# Allegro board RM08K_TEST_V10.brd
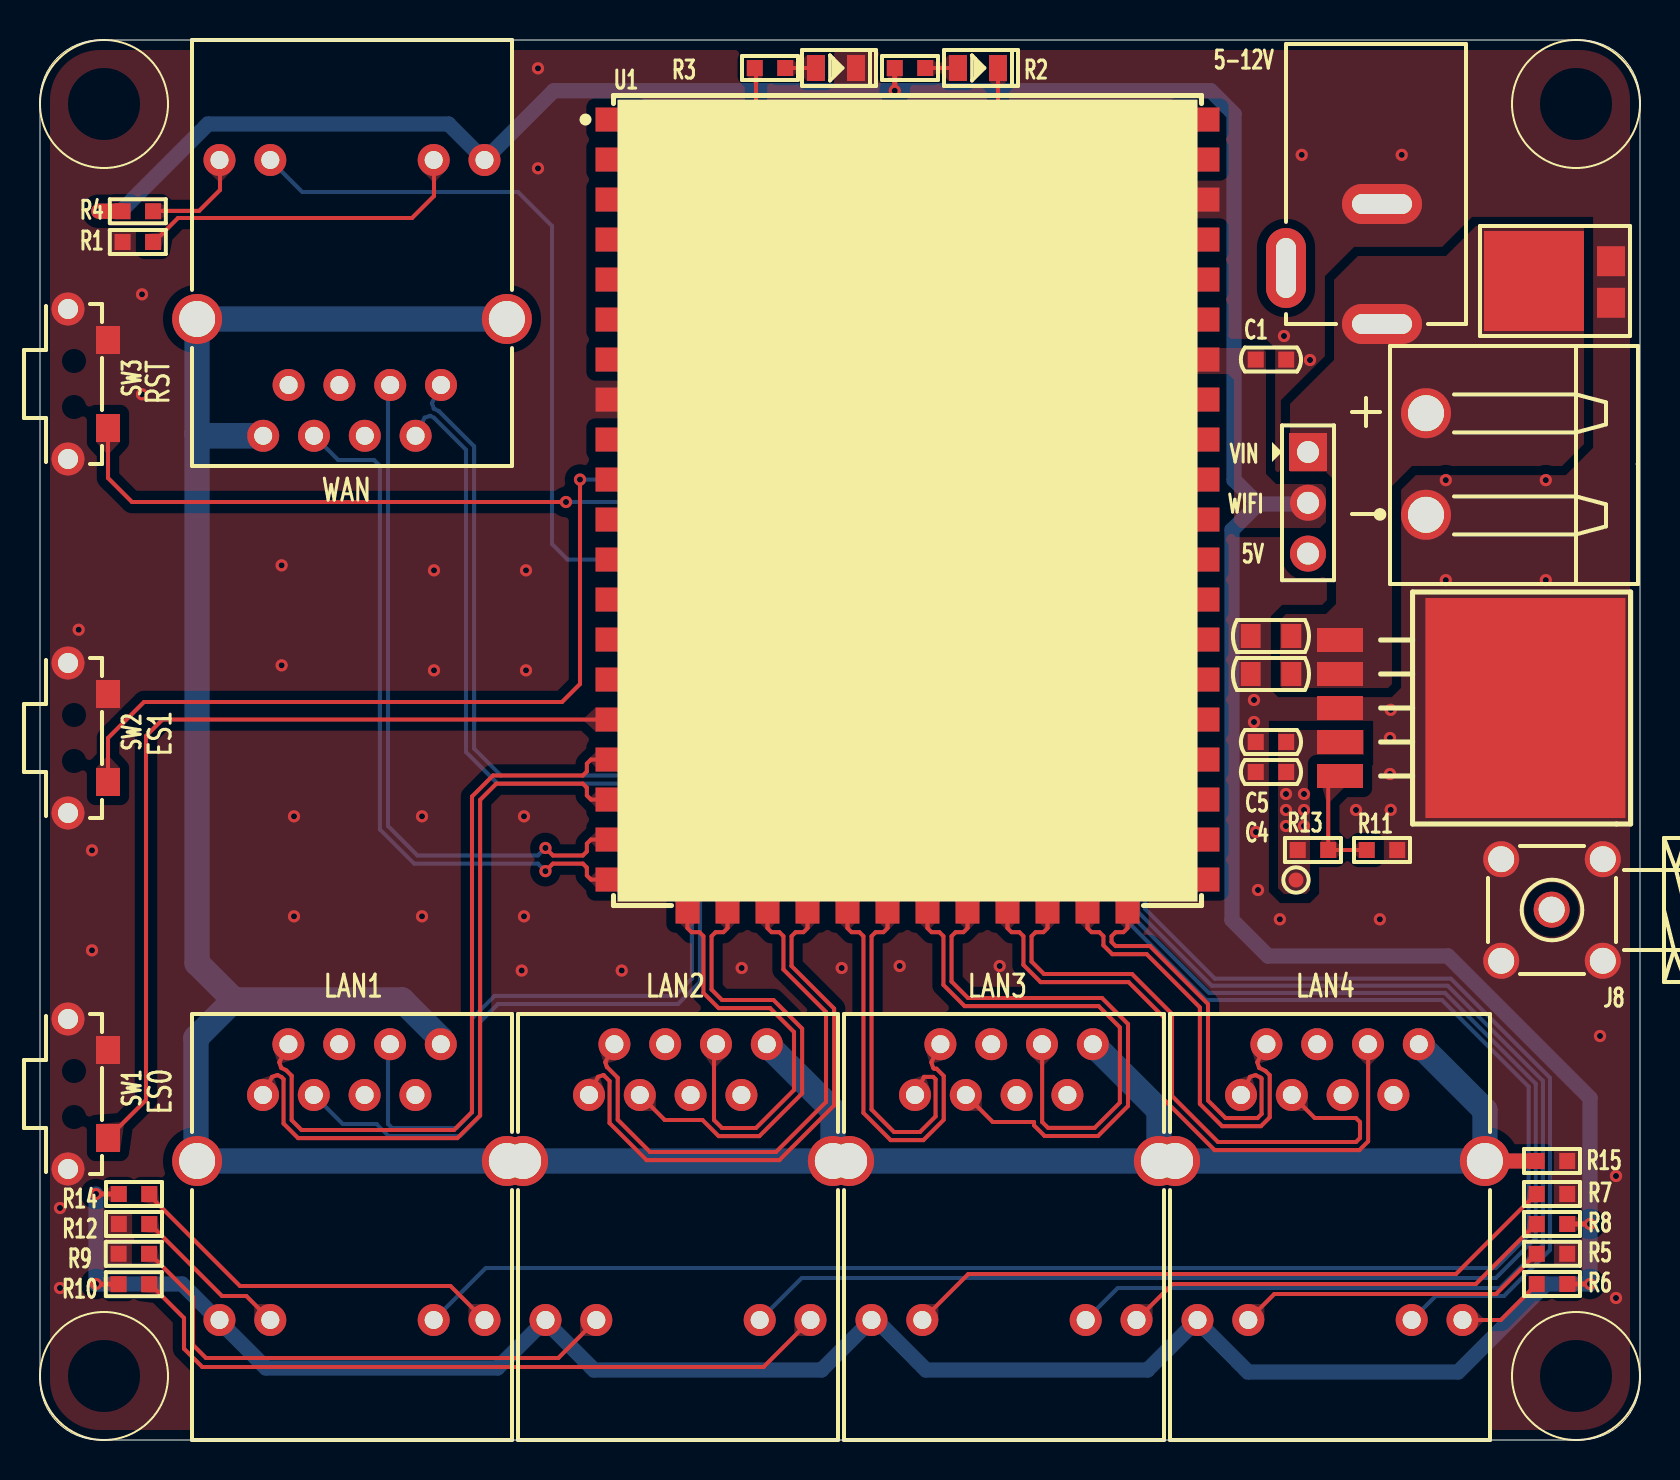
[diagram p0: board, top side]
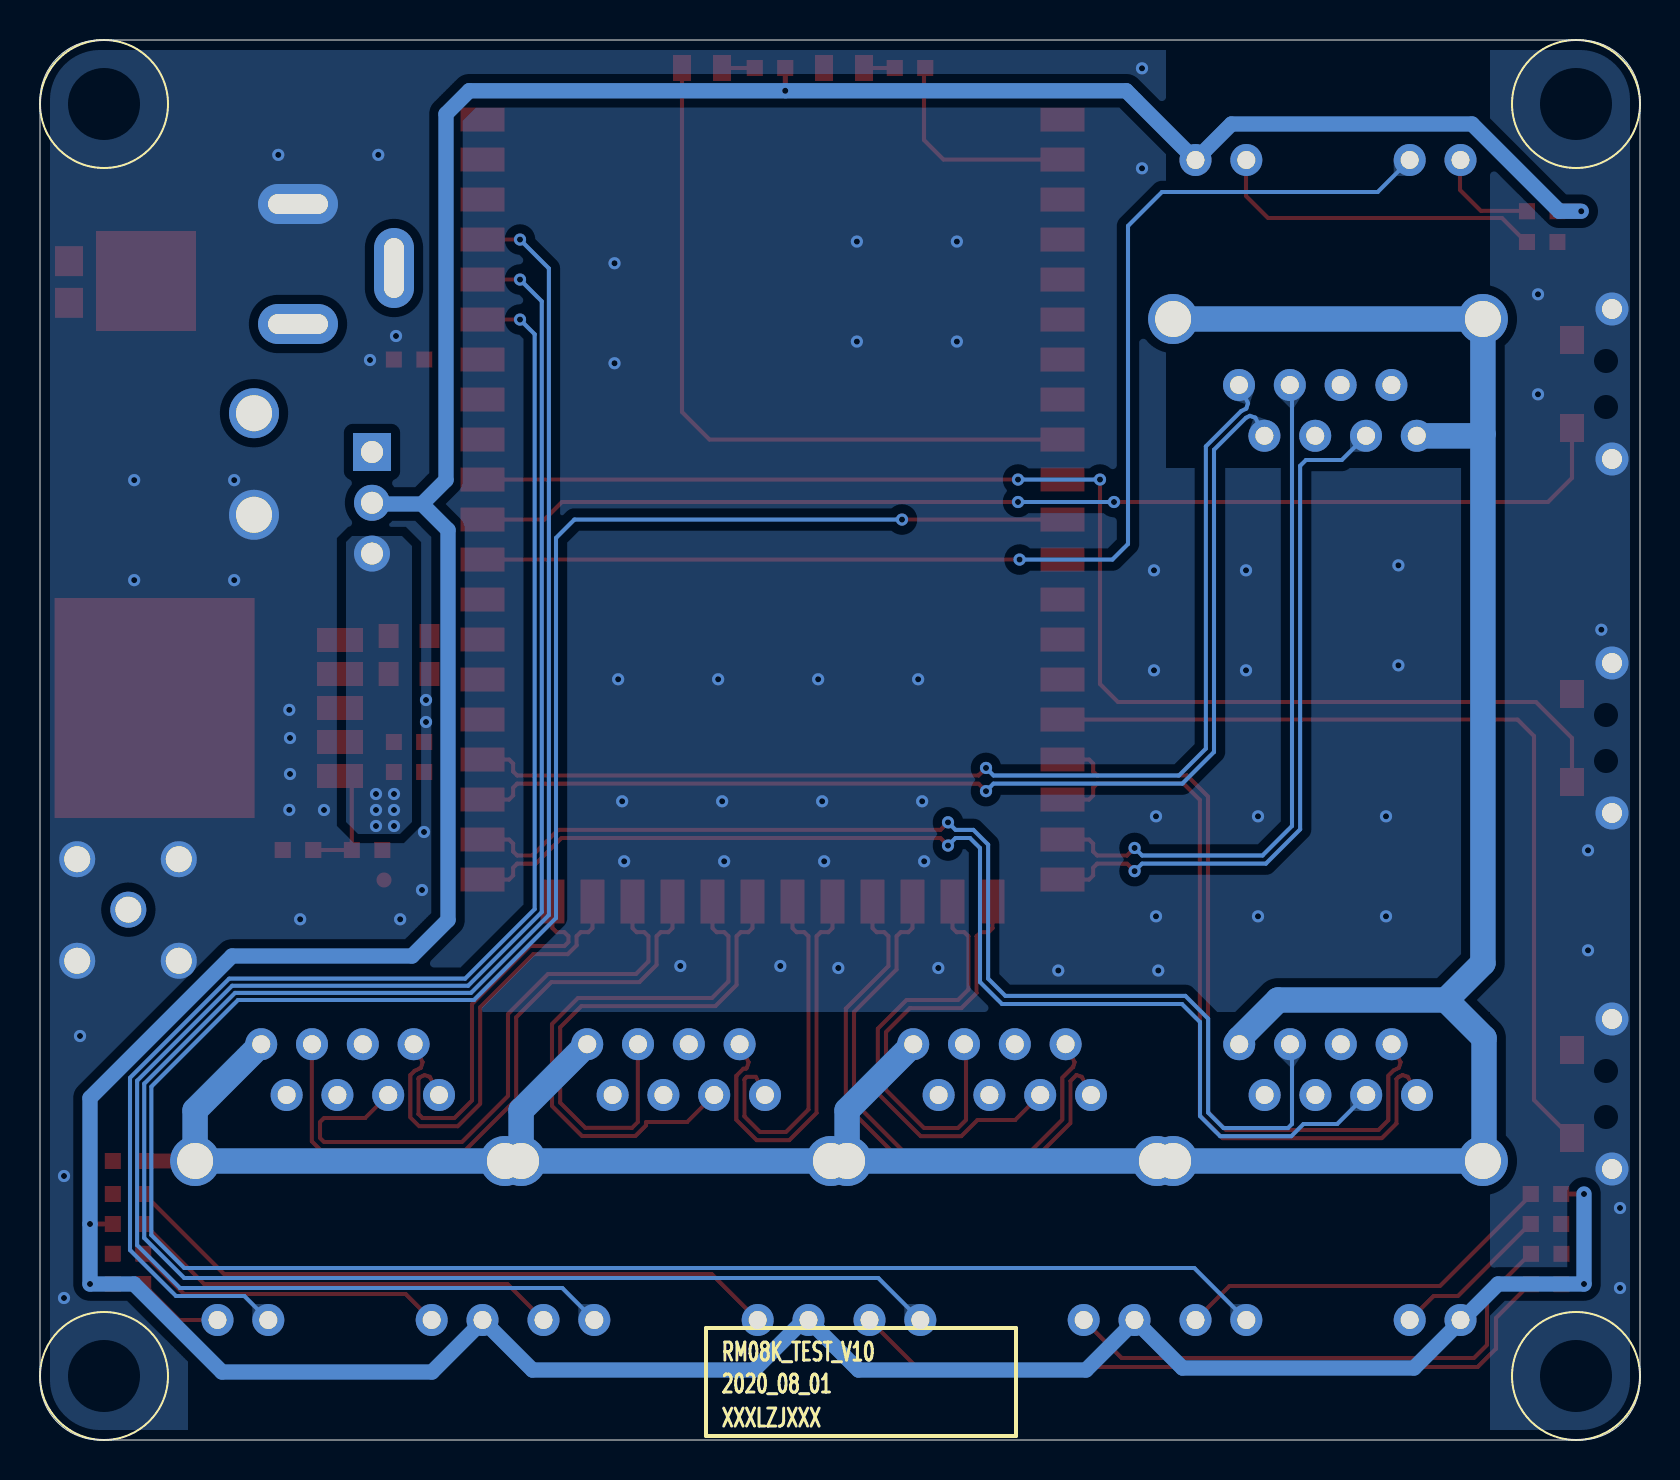
[diagram p1: board, bottom side, seen from below]

Outline 80 x 70 mm; copper layers: TOP, BOTTOM. Coordinates in mm from the lower left corner of the outline.
Outline path: 0,67 arc(0.88,69.12) 3,70 77,70 arc(79.12,69.12) 80,67 80,3 arc(79.12,0.88) 77,0 3,0 arc(0.88,0.88) 0,3 0,67

## Design rules (mm)
constraint set DEFAULT: min track width 0.203, pair gap 0.203
net group DP1: nets RXN0 RXP0
net group DP2: nets RXN1 RXP1
net group DP3: nets RXN2 RXP2
net group DP4: nets RXN3 RXP3
net group DP5: nets RXN4 RXP4
net group DP6: nets TXN0 TXP0
net group DP7: nets TXN1 TXP1
net group DP8: nets TXN2 TXP2
net group DP9: nets TXN3 TXP3
net group DP10: nets TXN4 TXP4

## Placement (name value [footprint] x y rotation side)
C1  100F_50V  [C0603]  61.55 54.02 0 top
C2  10uF_25V  [C0805]  61.55 40.2 180 top
C3  10uF_25V  [C0805]  61.55 38.3 180 top
C4  10uF_16V  [C0603]  61.55 33.4 180 top
C5  10uF_16V  [C0603]  61.55 34.9 180 top
D1  LED_GREEN  [LED0805]  46.9 68.6 0 top
D2  LED_GREEN  [LED0805]  39.8 68.6 0 top
D3  V10P10  [TO-277A]  77.2 57.9 90 top
DC1  -  [DC005]  67.1 61.8 270 top
J1  -  [HR911105A]  15.6 59.1 90 top
J2  -  [HR911105A]  64.5 10.9 270 top
J3  -  [HR911105A]  48.2 10.9 270 top
J4  -  [HR911105A]  31.9 10.9 270 top
J5  -  [HR911105A]  15.6 10.9 270 top
J6  -  [CN1X3-2P54-Z]  63.4 49.4 270 top
J7  WJ2EDGRC-5.08-2P  [WJ2EDGRC-5R08-2P]  69.3 48.8 90 top
J8  SMA-50R/NI  [SMA-50R-DIP]  75.6 26.5 0 top
R1  510R  [R0603]  4.89 59.9 0 top
R2  10K  [R0603]  43.5 68.6 180 top
R3  10K  [R0603]  36.5 68.6 180 top
R4  510R  [R0603]  4.89 61.44 0 top
R5  510R  [R0603]  75.6 9.31 180 top
R6  510R  [R0603]  75.6 7.8 180 top
R7  510R  [R0603]  75.6 12.3 180 top
R8  510R  [R0603]  75.6 10.8 180 top
R9  510R  [R0603]  4.69 9.31 0 top
R10  510R  [R0603]  4.69 7.79 0 top
R11  2K  [R0603]  67.1 29.5 180 top
R12  510R  [R0603]  4.7 10.8 0 top
R13  6.19K  [R0603]  63.65 29.5 180 top
R14  510R  [R0603]  4.7 12.3 0 top
R15  0R  [R0603]  75.6 13.95 0 top
SW1  -  [K2-1112SW-A4SW-04]  1.7 17.3 90 top
SW2  -  [K2-1112SW-A4SW-04]  1.7 35.1 90 top
SW3  -  [K2-1112SW-A4SW-04]  1.7 52.8 90 top
TP1  TestPoint/NI  [TP-0R75]  62.8 28 0 top
U1  -  [HLK-RM08K]  43.38 46.52 270 top
U2  LT1764AEQ  [TO263-5]  65 36.6 270 top

## Library data of the parts
C1 = CAP NP_2
C2-C5 = CAP NP
D1 D2 = LED_4
D3 = DIODE13_6
DC1 = DC005
J1-J5 = CON_RJ45_1X8_F_RA_0
J6 = CONN RCPT 3
J7 = CONN RCPT 2
J8 = SMA-50R_0
R1-R15 = R_Generic
SW1-SW3 = SWITCH-SPST-4P
TP1 = TestPoint
U1 = HLK-RM08K
U2 = LT1764AEQ

## Footprints (pads in the part's own frame, mm; a bottom-side part is the same pattern mirrored in y, then rotated)
C0603
  rect 0.8x0.8 smd: 1(-0.762,0) 2(0.762,0)
C0805
  rect 1x1.2 smd: 1(-1.016,0) 2(1.016,0)
CN1X3-2P54-Z
  rect 1.9x1.9 hole 1.1: 1(0,0)
  round 1.8 hole 1.1: 2(2.54,0) 3(5.08,0)
DC005
  oval 2x4 hole 1x3: 1(6,0) 2(0,0)
  oval 4x2 hole 3x1: 3(3.2,-4.8)
HLK-RM08K
  rect 1.2x2.2 smd: 1(-19.5,-14.5) 2(-17.5,-14.5) 3(-15.5,-14.5) 4(-13.5,-14.5) 5(-11.5,-14.5) 6(-9.5,-14.5) 7(-7.5,-14.5) 8(-5.5,-14.5) 9(-3.5,-14.5) 10(-1.5,-14.5) 11(0.5,-14.5) 12(2.5,-14.5) 13(4.5,-14.5) 14(6.5,-14.5) 15(8.5,-14.5) 16(10.5,-14.5) 17(12.5,-14.5) 18(14.5,-14.5) 19(16.5,-14.5) 20(18.5,-14.5) 33(18.5,14.5) 34(16.5,14.5) 35(14.5,14.5) 36(12.5,14.5) 37(10.5,14.5) 38(8.5,14.5) 39(6.5,14.5) 40(4.5,14.5) 41(2.5,14.5) 42(0.5,14.5) 43(-1.5,14.5) 44(-3.5,14.5) 45(-5.5,14.5) 46(-7.5,14.5) 47(-9.5,14.5) 48(-11.5,14.5) 49(-13.5,14.5) 50(-15.5,14.5) 51(-17.5,14.5) 52(-19.5,14.5)
  rect 2.2x1.2 smd: 21(19.6,-11) 22(19.6,-9) 23(19.6,-7) 24(19.6,-5) 25(19.6,-3) 26(19.6,-1) 27(19.6,1) 28(19.6,3) 29(19.6,5) 30(19.6,7) 31(19.6,9) 32(19.6,11)
HR911105A
  round 1.6 hole 0.9: 1(-6.35,-4.45) 2(-8.89,-3.18) 3(-6.35,-1.91) 4(-8.89,-0.64) 5(-6.35,0.63) 6(-8.89,1.9) 7(-6.35,3.17) 8(-8.89,4.44) 9(4.9,-6.625) 10(4.9,-4.085) 11(4.9,4.085) 12(4.9,6.625)
  round 2.5 hole 1.8: 13(-3.05,-7.745) 14(-3.05,7.745)
K2-1112SW-A4SW-04
  round 1.65 hole 1: 1(-3.75,0.3) 4(3.75,0.3)
  rect 1.4x1.2 smd: 2(-2.2,-1.7) 3(2.2,-1.7)
LED0805
  rect 0.9x1.3 smd: 1(-1,0) 2(1,0)
R0603
  rect 0.8x0.8 smd: 1(-0.762,0) 2(0.762,0)
SMA-50R-DIP
  round 1.8 hole 1.3: 1(-0.016,0.016) 2(-2.54,2.54) 3(-2.54,-2.54) 4(2.54,-2.54) 5(2.54,2.54)
TO263-5
  rect 1.2x2.3 smd: 1(-3.4,0) 2(-1.7,0) 3(0,0) 4(1.7,0) 5(3.4,0)
  rect 11x10 smd: 6(0,9.27)
TO-277A
  rect 1.5x1.4 smd: 1(-1.04,-1.35) 2(1.04,-1.35)
  rect 5x5 smd: 3(0.05,2.5)
TP-0R75
  round 0.75 smd: 1(0,0)
WJ2EDGRC-5R08-2P
  round 2.5 hole 1.8: 1(-2.54,0) 2(2.54,0)

## Nets
GND: C1.2 C2.2 C3.2 C4.2 C5.2 D2.2(CATHODE) D3.1 D3.2 DC1.2 J7.1 J8.2 J8.3 J8.4 J8.5 R1.1 R5.1 R7.1 R9.1 R11.1 R12.1 R15.2 SW1.1 SW1.3 SW1.4 SW2.1 SW2.3 SW2.4 SW3.1 SW3.3 SW3.4 U1.8 U1.50 U2.3 U2.6
GND_EARTH: J1.8 J1.13 J1.14 J2.8 J2.13 J2.14 J3.8 J3.13 J3.14 J4.8 J4.13 J4.14 J5.8 J5.13 J5.14 R15.1
VCC_5V: C4.1 C5.1 J6.3 R13.2 TP1.1 U2.4
VCC_5V_WIFI: C1.1 J1.9 J2.9 J3.9 J4.9 J5.9 J6.2 R2.2 R4.1 R6.1 R8.1 R10.1 R14.1 U1.46
VCC_12V: C2.1 C3.1 D3.3(CATHODE) DC1.1 J6.1 J7.2 U2.1(S\H\D\N\) U2.2
EL1: J2.11 U1.47
EL2: J3.11 U1.48
EL3: J4.11 U1.49
EL4: J5.11 U1.11
ELED0: J1.11 U1.41
ES0: SW1.2 U1.16
ES1: SW2.2 U1.43
RST: SW3.2 U1.42
RXN0: J1.6 U1.20
RXN1: J2.6 U1.29
RXN2: J3.6 U1.27
RXN3: J4.6 U1.21
RXN4: J5.6 U1.34
RXP0: J1.3 U1.19
RXP1: J2.3 U1.30
RXP2: J3.3 U1.28
RXP3: J4.3 U1.22
RXP4: J5.3 U1.33
TXN0: J1.2 U1.35
TXN1: J2.2 U1.31
TXN2: J3.2 U1.25
TXN3: J4.2 U1.23
TXN4: J5.2 U1.17
TXP0: J1.1(TXP1) U1.36
TXP1: J2.1(TXP1) U1.32
TXP2: J3.1(TXP1) U1.26
TXP3: J4.1(TXP1) U1.24
TXP4: J5.1(TXP1) U1.18
WDG: R3.2 U1.2
WIFI_LED: D1.2(CATHODE) U1.9(WLED_N)
N17240237: D1.1 R2.1
N17240877: J1.10 R1.2
N17240928: J1.12 R4.2
N17243940: R11.2 R13.1 U2.5
N17245482: D2.1 R3.1
N17246378: J2.10 R5.2
N17246417: J2.12 R6.2
N17246644: J3.10 R7.2
N17246683: J3.12 R8.2
N17246920: J4.10 R9.2
N17246959: J4.12 R10.2
N17247205: J5.10 R12.2
N17247244: J5.12 R14.2

Pads without a net: DC1 3; J1 4 5 7; J2 4 5 7; J3 4 5 7; J4 4 5 7; J5 4 5 7; J8 1; U1 1 3 4 5 6 7 10 12 13 14 15 37 38 39 40 44 45 51 52

## Via types
v1: diameter 0.61, hole 0.305, TOP to BOTTOM, 94 vias

## Routing (per net, layer and track width the routed paths; a pad name or vN(x,y) marks a point on that pad's centre or on a via; arc(x,y) is an arc through that point)
GND:
  vias: v1(1,11.6) v1(1,7.6) v1(1.93,40.51) v1(2.6,29.48) v1(2.6,24.48) v1(5.1,57.28) v1(5.1,52.28) v1(12.08,43.73) v1(12.08,38.73) v1(12.7,31.18) v1(12.7,26.18) v1(19.1,31.18) v1(19.1,26.18) v1(19.7,43.48) v1(19.7,38.48) v1(24.09,23.47) v1(24.2,31.18) v1(24.2,26.18) v1(24.3,43.48) v1(24.3,38.48) v1(24.9,68.58) v1(24.9,63.58) v1(29.09,23.47) v1(34.16,59.92) v1(34.16,54.92) v1(35.08,23.6) v1(35.79,28.94) v1(35.89,31.94) v1(36.09,38.04) v1(39.16,59.92) v1(39.16,54.92) v1(40.08,23.6) v1(40.79,28.94) v1(40.89,31.94) v1(41.09,38.04) v1(42.98,23.7) v1(45.79,28.94) v1(45.89,31.94) v1(46.09,38.04) v1(47.98,23.7) v1(50.79,28.94) v1(50.89,31.94) v1(51.09,38.04) v1(51.27,58.84) v1(51.27,53.84) v1(60.7,37) v1(60.7,35.9) v1(60.8,30.4) v1(60.9,27.5) v1(61.99,26.04) v1(62.2,55.2) v1(63.09,64.26) v1(63.5,54) v1(65.8,31.5) v1(66.99,26.04) v1(67.54,36.51) v1(67.5,35.1) v1(67.5,33.3) v1(67.54,31.51) v1(68.09,64.26) v1(70.29,47.99) v1(70.29,42.99) v1(75.29,47.99) v1(75.29,42.99) v1(78,20.2) v1(78.8,13.2) v1(78.8,7.1)
GND_EARTH: length 162.5
  TOP w0.762: R15.1 J2.14
  BOTTOM w1.27: J5.8 20.04,20.06 18.1,22 9.7,22 ; 7.86,50.3 7.95,50.21 J1.8 ; 7.86,50.3 7.86,56.05 J1.13 ; 7.86,50.3 7.86,23.84 9.7,22 ; J4.14 J5.14 7.86,13.95 7.8,14.01 7.8,20.1 9.7,22 ; J4.14 J3.13 J3.14 ; J4.14 39.65,16.48 J4.8 ; J3.14 J2.13 J2.14 72.25,16.48 J2.8 ; J3.14 55.95,16.48 J3.8
VCC_5V:
  vias: v1(62.3,32.3) v1(62.3,31.5) v1(62.3,30.7) v1(63.2,32.3) v1(63.2,31.5) v1(63.2,30.7)
VCC_5V_WIFI: length 232
  TOP w0.254: R8.1 v1(77.5,10.8) ; R14.1 v1(2.8,12.3) ; R10.1 2.81,7.79 v1(2.8,7.8) ; v1(77.5,7.8) R6.1 ; R2.2 v1(42.74,67.46)
  TOP w0.762: 3.92,7.8 R10.1 ; R4.1 v1(2.94,61.44)
  BOTTOM w0.762: 60.9,46.8 59.6,45.5 59.6,26 61.4,24.2 70.4,24.2 77.5,17.1 v1(77.5,10.8) v1(77.5,7.8) 75.3,7.8 70.9,3.4 60.4,3.4 57.88,5.92 J2.9 55.38,3.5 44.3,3.5 41.8,6 J3.9 39.08,3.5 27.7,3.5 25.27,5.92 J4.9 22.88,3.6 11.3,3.6 8.97,5.92 J5.9 8.9,6 7.1,7.8 v1(2.8,7.8) v1(2.8,12.3) ; 60.9,46.8 63.34,46.8 J6.2 ; 60.9,46.8 59.7,48 59.7,66.3 58.54,67.46 v1(42.74,67.46) 25.69,67.46 J1.9 20.43,65.8 8.4,65.8 4.04,61.44 v1(2.94,61.44)
EL1: length 72.4
  TOP w0.203: U1.47 v1(56,56.02)
  BOTTOM w0.203: J2.11 69.78,7.2 73.2,7.2 75.5,9.5 75.5,18.11 70.54,23.07 58.74,23.07 55.27,26.54 55.27,55.29 v1(56,56.02)
EL2: length 90.3
  TOP w0.203: U1.48 v1(56,58.02)
  BOTTOM w0.203: 52.28,6 53.88,7.6 73,7.6 75.14,9.74 75.14,17.96 70.39,22.71 58.59,22.71 54.91,26.39 54.91,56.93 v1(56,58.02)
EL3: length 108.2
  TOP w0.203: U1.49 v1(56,60.02)
  BOTTOM w0.203: v1(56,60.02) 54.56,58.58 54.56,26.25 58.45,22.36 70.25,22.36 74.79,17.81 74.79,10.1 72.79,8.1 38.09,8.1 J4.11
EL4: length 132.4
  TOP w0.203: U1.11 v1(36.9,46.02)
  BOTTOM w0.203: J5.11 22.29,8.6 72.79,8.6 74.43,10.25 74.43,17.67 70.1,22 58.3,22 54.2,26.1 54.2,45.1 53.28,46.02 v1(36.9,46.02)
ELED0: length 63.9
  TOP w0.203: U1.41 v1(31.02,44.02)
  BOTTOM w0.203: v1(31.02,44.02) 26.38,44.02 25.6,44.8 25.6,60.7 23.9,62.4 13.12,62.4 J1.11
ES0: length 44.8
  TOP w0.203: U1.16 6.12,36.02 5.3,35.2 5.3,17 SW1.2
ES1: length 68
  TOP w0.203: SW2.2 3.4,35.1 5.2,36.9 26.1,36.9 27,37.8 v1(27,48.02) ; U1.43 v1(31.1,48.02)
  BOTTOM w0.203: v1(31.1,48.02) v1(27,48.02)
RST: length 57.8
  TOP w0.203: U1.42 54.78,46.02 53.9,46.9 v1(31.1,46.9) ; v1(26.3,46.9) 4.6,46.9 3.4,48.1 SW3.2
  BOTTOM w0.203: v1(31.1,46.9) v1(26.3,46.9)
RXN0: length 35.6
  TOP w0.203: U1.20 27.55,28.02 27.34,28.23 27.34,28.62 27.14,28.82 25.65,28.82 v1(25.27,28.44)
  BOTTOM w0.203: J1.6 14.91,49 16.7,49 16.99,48.71 16.99,30.53 18.71,28.82 24.89,28.82 v1(25.27,28.44)
RXN1: length 32.2
  TOP w0.203: U1.29 48.38,25.59 48.58,25.39 48.97,25.39 49.17,25.19 49.17,23.75 50.03,22.89 54.43,22.89 56.19,21.13 56.19,17.03 58.73,14.49 65.97,14.49 66.41,14.93 66.41,19.78 J2.6
RXN2: length 26.6
  TOP w0.203: U1.27 44.38,25.59 44.58,25.39 44.97,25.39 45.17,25.19 45.17,22.75 46.23,21.69 52.93,21.69 53.99,20.63 53.99,16.87 52.73,15.61 50.4,15.61 50.11,15.9 50.11,19.78 J3.6
RXN3: length 22.1
  TOP w0.203: U1.21 32.38,25.59 32.58,25.39 32.97,25.39 33.17,25.19 33.17,22.35 33.93,21.59 36.51,21.59 37.7,20.4 37.7,17.5 35.8,15.6 34.1,15.6 33.7,16 33.7,19.69 J4.6
RXN4: length 58.8
  TOP w0.203: v1(34.6,30.88) 34.98,30.51 54.09,30.51 55.37,29.23 56.14,29.23 56.34,29.43 56.34,29.82 56.55,30.02 U1.34
  BOTTOM w0.203: J5.6 17.4,19.69 17.4,15.8 17.6,15.6 20.82,15.6 21.59,16.37 21.59,21.07 22.73,22.21 31.73,22.21 32.59,23.07 32.59,29.77 33.33,30.51 34.22,30.51 v1(34.6,30.88)
RXP0: length 35.1
  TOP w0.203: v1(25.27,29.6) 25.65,29.23 27.14,29.23 27.34,29.43 27.34,29.82 27.55,30.02 U1.19
  BOTTOM w0.203: v1(25.27,29.6) 24.89,29.23 18.87,29.23 17.4,30.7 17.4,52.64 J1.3
RXP1: length 31
  TOP w0.203: U1.30 50.38,25.59 50.17,25.39 49.78,25.39 49.58,25.19 49.58,23.92 50.2,23.3 54.6,23.3 56.6,21.3 56.6,17.2 58.9,14.9 65.8,14.9 66,15.1 66,15.9 65.8,16.1 63.74,16.1 J2.3
RXP2: length 28
  TOP w0.203: J3.3 47.64,15.9 49.7,15.9 49.7,15.73 50.23,15.2 52.9,15.2 54.4,16.7 54.4,20.8 53.1,22.1 46.4,22.1 45.58,22.92 45.58,25.19 45.78,25.39 46.17,25.39 46.38,25.59 U1.28
RXP3: length 23.4
  TOP w0.203: U1.22 34.38,25.59 34.17,25.39 33.78,25.39 33.58,25.19 33.58,22.52 34.1,22 36.67,22 38.11,20.57 38.11,17.33 35.97,15.19 33.93,15.19 33.13,16 31.24,16 J4.3
RXP4: length 59.3
  TOP w0.203: v1(34.6,29.72) 34.98,30.1 53.93,30.1 55.21,28.82 56.14,28.82 56.34,28.62 56.34,28.23 56.55,28.02 U1.33
  BOTTOM w0.203: v1(34.6,29.72) 34.22,30.1 33.5,30.1 33,29.6 33,22.9 31.9,21.8 22.9,21.8 22,20.9 22,16.2 20.99,15.19 17.43,15.19 16.83,15.8 15.14,15.8 J5.3
TXN0: length 57
  TOP w0.203: U1.35 56.55,32.02 56.34,32.23 56.34,32.62 56.14,32.82 33.08,32.82 v1(32.7,32.44)
  BOTTOM w0.203: v1(32.7,32.44) 32.32,32.82 22.88,32.82 21.3,34.4 21.3,49.51 19.7,51.11 19.51,51.21 19.23,51.12 J1.2
TXN1: length 21.9
  TOP w0.203: J2.2 60.87,18.88 60.96,18.61 60.97,18.61 61.27,18.45 61.49,18.24 61.49,16.13 61.04,15.69 59.11,15.69 57.99,16.81 57.99,21.63 55.33,24.29 53.61,24.29 53.17,24.73 53.17,25.19 52.97,25.39 52.58,25.39 52.38,25.59 U1.31
TXN2: length 20.3
  TOP w0.203: U1.25 40.38,25.59 40.58,25.39 40.97,25.39 41.17,25.19 41.17,16.35 42.53,14.99 44.17,14.99 45.19,16.01 45.19,18.2 44.83,18.56 44.71,18.56 44.66,18.61 44.57,18.88 J3.2
TXN3: length 27.7
  TOP w0.203: U1.23 36.38,25.59 36.58,25.39 36.97,25.39 37.17,25.19 37.17,23.53 39.3,21.4 39.3,16.9 36.8,14.4 30.5,14.4 28.89,16.01 28.89,18.11 28.34,18.65 28.27,18.88 J4.2
TXN4: length 37.8
  TOP w0.203: J5.2 11.97,18.88 12.06,18.61 12.31,18.48 12.59,18.21 12.59,15.99 13.07,15.5 20.7,15.5 21.6,16.4 21.6,32.17 22.65,33.23 27.14,33.23 27.34,33.43 27.34,33.82 27.55,34.02 U1.17
TXP0: length 56.8
  TOP w0.203: U1.36 56.55,34.02 56.34,33.82 56.34,33.43 56.14,33.23 33.08,33.23 v1(32.7,33.6)
  BOTTOM w0.203: J1.1 19.6,51.84 19.69,51.57 19.94,51.44 21.71,49.68 21.71,34.57 23.05,33.23 32.32,33.23 v1(32.7,33.6)
TXP1: length 20.1
  TOP w0.203: J2.1 60.5,18.16 60.78,18.25 61.03,18.12 61.08,18.07 61.08,16.3 60.88,16.1 59.28,16.1 58.4,16.97 58.4,21.8 55.5,24.7 53.78,24.7 53.58,24.9 53.58,25.19 53.78,25.39 54.17,25.39 54.38,25.59 U1.32
TXP2: length 18.4
  TOP w0.203: U1.26 42.38,25.59 42.17,25.39 41.78,25.39 41.58,25.19 41.58,16.52 42.7,15.4 44,15.4 44.78,16.18 44.78,18.04 44.66,18.16 44.2,18.16 J3.1
TXP3: length 28.6
  TOP w0.203: J4.1 27.9,18.16 28.18,18.25 28.48,17.94 28.48,15.85 30.33,13.99 36.97,13.99 39.71,16.73 39.71,21.57 37.58,23.7 37.58,25.19 37.78,25.39 38.17,25.39 38.38,25.59 U1.24
TXP4: length 38
  TOP w0.203: J5.1 11.6,18.16 11.88,18.25 12.07,18.15 12.18,18.04 12.18,15.82 12.91,15.09 20.87,15.09 22.01,16.23 22.01,32.01 22.82,32.82 27.14,32.82 27.34,32.62 27.34,32.23 27.55,32.02 U1.18
WDG: length 11
  TOP w0.203: U1.2 34.82,64.02 35.8,65 35.8,68.54 R3.2
WIFI_LED: length 36.8
  TOP w0.203: D1.2 47.9,51.4 46.52,50.02 U1.9
N17240237: length 1.6
  TOP w0.203: D1.1 R2.1
N17240877: length 16.8
  TOP w0.203: R1.2 5.7,59.9 6.9,61.1 18.6,61.1 19.7,62.2 19.7,63.98 J1.10
N17240928: length 5.3
  TOP w0.203: J1.12 9,63.98 9,62.5 7.96,61.46 5.67,61.46 R4.2
N17243940: length 6
  TOP w0.203: R11.2 R13.1 64.41,32.91 64.7,33.2 U2.5
N17245482: length 1.5
  TOP w0.203: R3.1 D2.1
N17246378: length 15.8
  TOP w0.203: R5.2 74.81,9.31 72.8,7.3 61.72,7.3 J2.10
N17246417: length 4.5
  TOP w0.203: R6.2 73.04,6 J2.12
N17246644: length 33.3
  TOP w0.203: R7.2 74.8,12.3 70.8,8.3 46.41,8.3 J3.10
N17246683: length 22
  TOP w0.203: J3.12 56.62,7.8 71.79,7.8 74.79,10.8 R8.2
N17246920: length 26.7
  TOP w0.203: R9.2 5.49,9.31 7.65,7.15 7.65,4.75 8.3,4.1 25.91,4.1 27.82,6
N17246959: length 36.7
  TOP w0.203: R10.2 5.51,7.79 7.2,6.1 7.2,4.56 8.11,3.65 36.17,3.65 J4.12
N17247205: length 8
  TOP w0.203: J5.10 10.31,7.2 9.1,7.2 5.5,10.8 R12.2
N17247244: length 19.4
  TOP w0.203: J5.12 20.52,7.7 10,7.7 5.46,12.24 R14.2

## Copper pours and planes (outline as drawn; the poured copper is in the pictures)
GND on TOP: 23.7,69.5 77,69.5 78.77,68.77 79.5,67 79.5,3 78.77,1.23 77,0.5 72.6,0.5 72.6,21.4 7.5,21.4 7.5,0.5 3,0.5 1.23,1.23 0.5,3 0.5,67 1.23,68.77 3,69.5 7.5,69.5 7.5,48.6 23.7,48.6 ; 6 cut-outs
GND on BOTTOM: 23.7,69.5 77,69.5 78.77,68.77 79.5,67 79.5,3 78.77,1.23 77,0.5 72.6,0.5 72.6,21.4 7.5,21.4 7.5,0.5 3,0.5 1.23,1.23 0.5,3 0.5,67 1.23,68.77 3,69.5 7.5,69.5 7.5,48.6 23.7,48.6 ; 4 cut-outs
VCC_5V on TOP: 66.2,35.5 61.9,35.5 61.9,27.6 62.2,27.3 63.3,27.3 63.5,27.5 63.5,33.9 63.8,34.2 66.2,34.2
VCC_5V on BOTTOM: 61.9,45.2 64.4,45.2 64.7,44.9 64.7,30.9 64.1,30.3 62,30.3 61.4,30.9 61.4,44.7
VCC_5V_WIFI on TOP: 64,45.6 60,45.6 59.7,45.9 59.7,53 59.4,53.3 56.7,53.3 56.7,54.6 61.1,54.6 61.3,54.4 61.3,48.3 61.8,47.8 64.1,47.8 64.3,47.6 64.3,45.9
VCC_12V on TOP: 62.5,48.4 62.5,51.8 64.7,54 64.7,58 65.9,59.2 70.3,59.2 71.8,60.7 77.2,60.7 77.2,49.8 76.1,48.7 68.6,48.7 67.6,47.7 67.6,37.8 67.4,37.6 62.1,37.6 62,37.7 62,41 62.3,41.3 64.3,41.3 64.8,41.8 64.8,47.9 64.3,48.4

Small or netless copper shapes (teardrops, artwork), in the pictures only: 101 on TOP, 26 on BOTTOM

## Text on the board
Ref Des/Silkscreen Bottom: RM08K_TEST_V10 | 2020_08_01 | XXXLZJXXX
Ref Des/Silkscreen Top: 5-12V | WIFI | VIN | 5V | WAN | LAN1 | LAN2 | LAN3 | LAN4 | RST | ES1 | ES0
BODY_CENTER: FIGURE | FINISHED_SIZE | 0.3048 | 0.9 | 1.0 | 1.1 | 1.3 | 1.8 | 3.0x1.0 | DRILL CHART: TOP to BOTTOM | ALL UNITS ARE IN MILLIMETERS | ROTATION | - | 0.000 | 90.000 | PLATED | QTY | 94 | 60 | 6 | 3 | 5 | 12 | 2 | 1 | 183 | TOTAL HOLES:
